# Altium PCB DP0507-0A0_20180605.PcbDoc
Units mm, origin at the board's own origin, x right, y up, seen from the top; angles counter-clockwise.
Board outline 106.5 x 35 mm, 2 copper layers (Top Layer, Bottom Layer); 39 components, 25 nets, 253 pads, 9 vias.
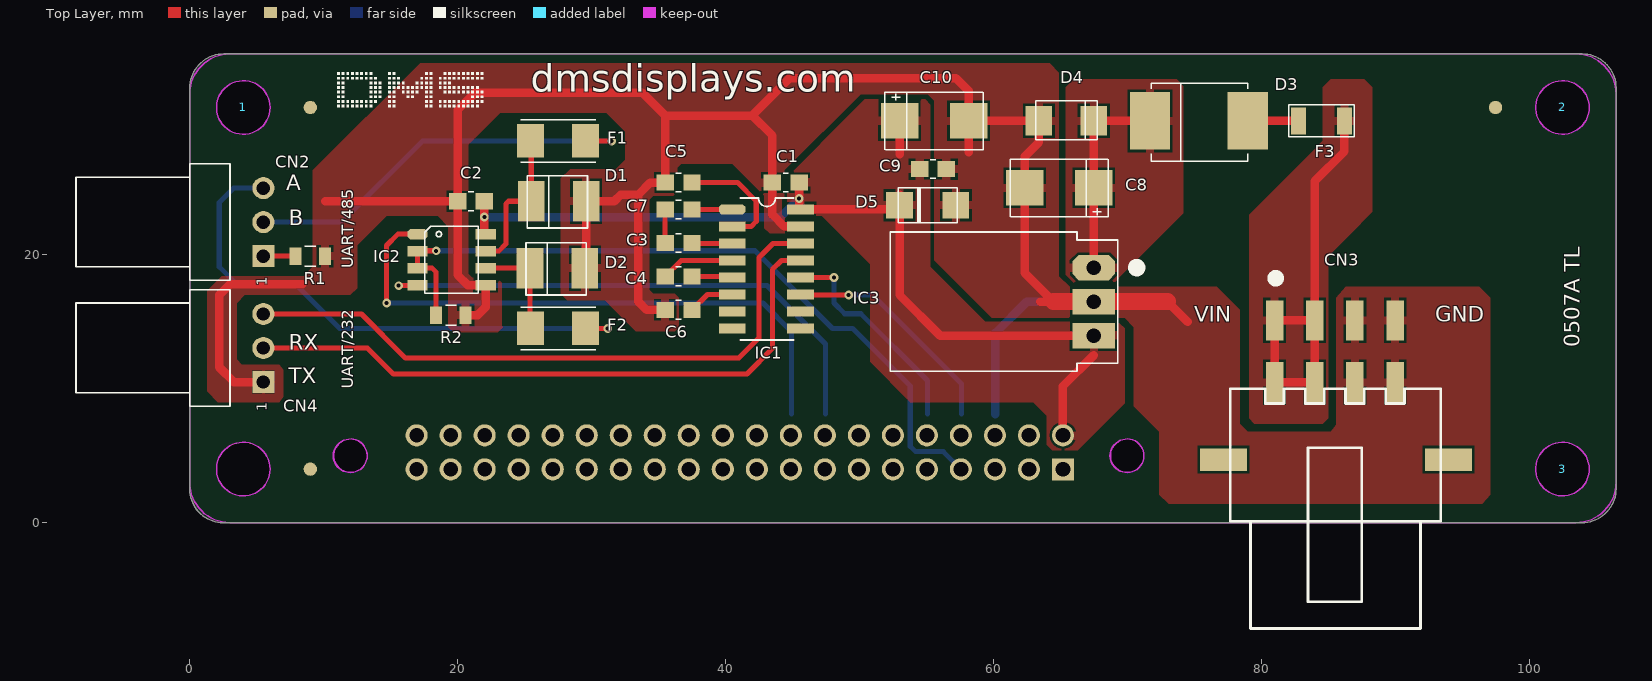
[diagram p0: Top Layer view]
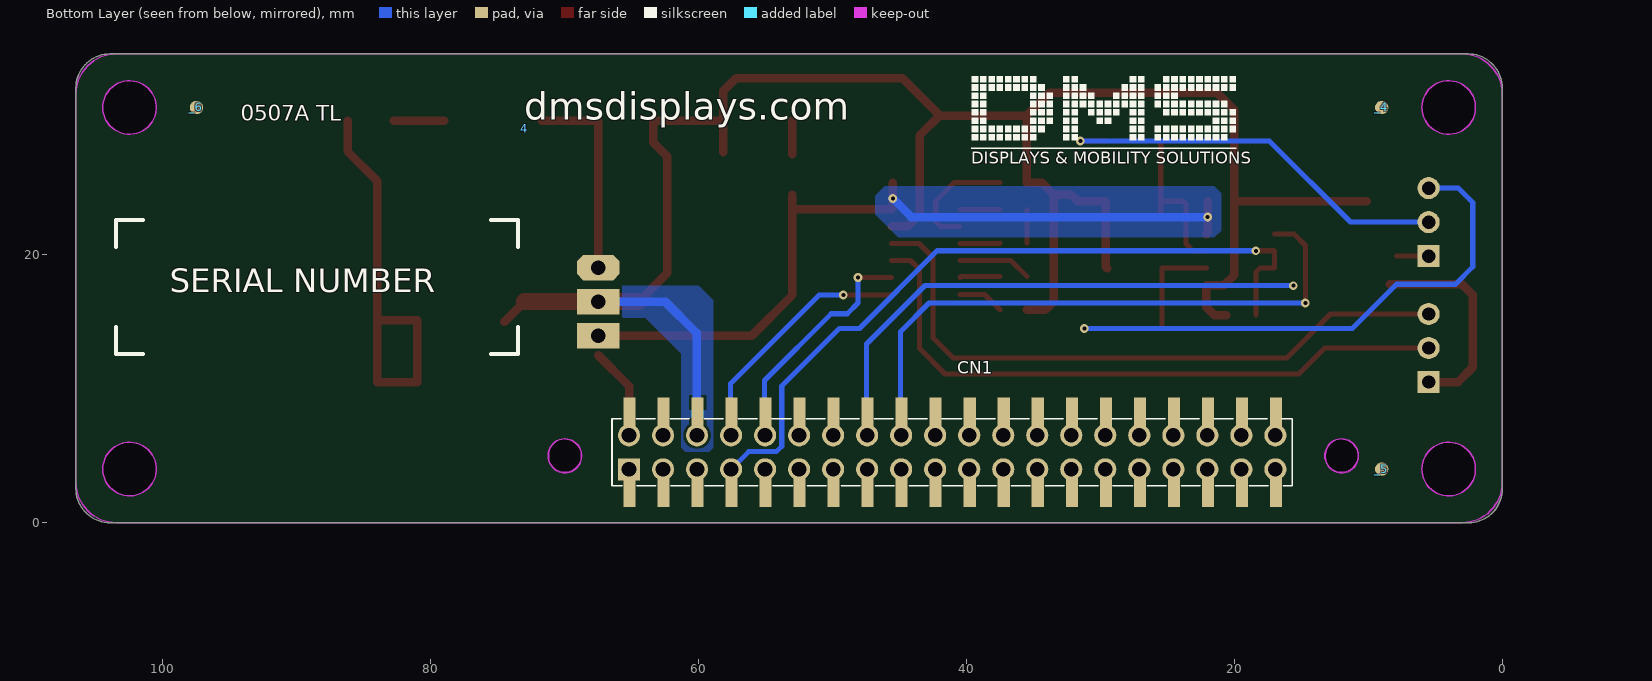
[diagram p1: Bottom Layer view, seen from below]

## Layer stack, top to bottom
Top Layer: signal copper 0.0356
Dielectric: dielectric 0.32, FR-4, Dk 4.8
Bottom Layer: signal copper 0.0356

## Board outline
0,2.5 ccw(c2.5,2.5) 2.5,0 3.5,0 103.96,0 ccw(c103.96,2.54) 106.5,2.54 106.5,4.5 106.5,32.46 ccw(c103.96,32.46) 103.96,35 103,35 2.54,35 ccw(c2.54,32.46) 0,32.46 0,32
cut-out: 10.7,5 cw(c11.95,5) 11.95,6.25 12,6.25 cw(c12,5.05) 13.2,5.05 13.2,4.9 cw(c12,4.9) 12,3.7 cw(c12,5) 10.7,5
cut-out: 68.7,5 cw(c69.95,5) 69.95,6.25 70,6.25 cw(c70,5.05) 71.2,5.05 71.2,4.9 cw(c70,4.9) 70,3.7 cw(c70,5) 68.7,5

## Design rules (kind name [scope] priority, off if disabled: settings)
AcuteAngle [InNetClass('ligacoes leds resistencias')] p1: minimum=4.50000000000000E+0001 checktracksonly=FALSE
Clearance Clearance_GND [(OnLayer('GND') AND InNet('GND')) vs OnLayer('Keep-Out Layer')] p1: gap=0.635
Clearance "Clearance_VCC_3.3V_VCC layer" [(OnLayer('VCC') AND InNet('VCC_3.3V'))] p2: gap=0.381
Clearance "Clearance_VIN_VCC layer" [(OnLayer('VCC') AND InNet('VIN'))] p3: gap=0.381
Clearance Clearance_VLEDS [InNet('VLEDS')] p4: gap=0.178
Clearance Clearance_VCC [InNet('VCC')] p5: gap=0.178
Clearance Clearance_VIN [InNet('VIN')] p6: gap=0.178
Clearance Clearance_GND_layer [(OnLayer('GND') AND InNet('GND'))] p7: gap=0.381
Clearance Clearance_Poli [(IsPad) vs (IsRegion)] p8: gap=0.178
Clearance "Clearance ALL" [All] p9: gap=0.178
ComponentClearance [All] p1 off: gap=0 collisioncheckmode=3 verticalgap=0.254 showdistances=FALSE
FabricationTestPointUsage TestPointUsage [All] p1: valid=2 allowmultiple=FALSE
FabricationTestpoint Testpoint [(IsPad And (OnTopLayer Or OnBottomLayer))] p1: side=3 testpointundercomponent=TRUE minsize=1.016 maxsize=2.54 preferedsize=1.524 minholesize=0.508 maxholesize=1.016 preferedholesize=0.813 testpointgrid=0.025 allowsidetop=TRUE allowsidebottom=TRUE usegrid=TRUE gridtolerance=0
FanoutControl Fanout_BGA [IsBGA] p1: bgadir=Out bgaviamode=Closest fanoutstyle=Staggered fanoutdirection=Alternating viagrid=0.025 // Fanout_BGA (Default Rule)
FanoutControl Fanout_LCC [IsLCC] p2: bgadir=Out bgaviamode=Centered fanoutstyle=Staggered fanoutdirection=Alternating viagrid=0.025 // Fanout_LCC (Default Rule)
FanoutControl Fanout_SOIC [IsSOIC] p3: bgadir=Out bgaviamode=Centered fanoutstyle=Staggered fanoutdirection=Alternating viagrid=0.025 // Fanout_SOIC (Default Rule)
FanoutControl Fanout_Small [(CompPinCount < 5)] p4: bgadir=Out bgaviamode=Centered fanoutstyle=Staggered fanoutdirection=OutThenIn viagrid=0.025 // Fanout_Small (Default Rule)
FanoutControl Fanout_Default [All] p5: bgadir=Out bgaviamode=Centered fanoutstyle=Staggered fanoutdirection=Alternating viagrid=0.025 // Fanout_Default (Default Rule)
HoleSize [All] p1: absolutevalues=TRUE maxlimit=12.7 minlimit=0.025 maxpercent=80.000 minpercent=20.000
HoleToHoleClearance [All] p1: gap=0.178 allowstackedmicrovias=TRUE
MinimumSolderMaskSliver [All] p1: minsoldermaskwidth=0.06
PlaneClearance [All] p1: clearance=0.254
PolygonConnect "Poligonos componentes" [All vs InComponentClass('Poligonos Componentes')] p1: connectstyle=Relief reliefconductorwidth=0.635 reliefentries=4 polygonreliefangle="90 Angle" airgapwidth=0.178
PolygonConnect PolygonConnect_VIAS [IsVia] p2: connectstyle=Direct reliefconductorwidth=0.254 reliefentries=4 polygonreliefangle="90 Angle" airgapwidth=0.254
RoutingCorners [InNetClass('ligacoes leds resistencias')] p1: cornerstyle=45-Degree minsetback=0.635 maxsetback=0.635
RoutingLayers [InNetClass('Ligação DRIVES_LEDS')] p1: top layer_v5=TRUE bottom layer_v5=FALSE
RoutingPriority RoutingPriority_1 [InNetClass('Ligação DRIVES_LEDS')] p1: routingpriority=100
RoutingTopology RoutingTopology_VERTICAL [OnLayer('MidLayer2')] p1: topology=Vertical
RoutingTopology RoutingTopology_HORIZONTAL [OnLayer('MidLayer1')] p2: topology=Horizontal
RoutingVias [All] p1: holewidth=0.3 width=0.65 viastyle="Through Hole" minholewidth=0.3 minwidth=0.65 maxholewidth=0.3 maxwidth=0.65
ShortCircuit ShortCircuit_1 [InComponent('CN1')] p1: allowed=TRUE
ShortCircuit [All] p2: allowed=FALSE
SilkToSilkClearance [All] p1: silktosilkclearance=-0.127
SilkToSolderMaskClearance SilkscreenOverComponentPads [IsPad] p1: minsilkscreentomaskgap=-0.127 clearancetoexposedcopper=TRUE
SolderMaskExpansion [(IsSMTPin)] p1: expansion=0
SolderMaskExpansion SolderMaskExpansion_1 [(IsVia)] p2: expansion=-0.508
ViasUnderSMD [All] p1: allowed=TRUE
Width Width_GND [InNet('GND')] p1: maxlimit=1.27 minlimit=0.254 preferedwidth=0.508
Width "Width_VIN and VDDAD" [(InNet('VIN') AND InNet('VDDAD'))] p2: maxlimit=12.7 minlimit=0.254 preferedwidth=0.635
Width Width_ALL [All] p3: maxlimit=12.7 minlimit=0.254 preferedwidth=0.254
9 further rules are at their usual default settings.

## Classes and differential pairs
component class DP0507-1A0: C1 C2 C3 C4 C5 C6 C7 C8 C9 C10 CN1 CN3 D1 D2 D3 D4 D5 F1 F2 F3 IC1 IC2 IC3 R1 R2
component class "Poligonos Componentes": C1 C2 C3 C4 C5 C6 C7 C8 C9 C10 CN1 CN3 D1 D2 D3 D4 D5 F1 F2 F3 IC1 IC2 IC3 R1 R2

## Components (designator, comment, footprint, x,y, rotation, side; value= is the part's Value field where it differs from the comment)
1 "" "ESPAÇADOR PCB_PRETO_BL_8MM" 4,31 r0 top
2 "" "ESPAÇADOR PCB_PRETO_BL_8MM" 102.5,31 r0 top
3 "" "ESPAÇADOR PCB_PRETO_BL_8MM" 102.5,4 r0 top
4 "" "site dmsdisplays.com_3x20mm" 73,29.4 r180 bottom
_4 "" "FIDUCTIAL MARK_1MM DIÂMETRO" 9,31 r180 bottom
_5 "" "FIDUCTIAL MARK_1MM DIÂMETRO" 9,4 r180 bottom
_6 "" "FIDUCTIAL MARK_1MM DIÂMETRO" 97.5,31 r180 bottom
C1 "B217602" C0805 44.5,25.39 r180 top
C2 "B217602" C0805 21,24 r180 top
C3 "B217613" C0805 36.5,20.89 r0 top
C4 "B217631" C0805 36.5,18.39 r0 top
C5 "B217631" C0805 36.5,25.39 r180 top
C6 "B217631" C0805 36.5,15.89 r180 top
C7 "B217613" C0805 36.5,23.39 r180 top
C8 "B217600" "COND ELECT SMD CASE C (TANTALO SMD 100UF/10V)" 67.5,25 r270 top
C9 "B217602" C0805 55.5,26.4 r0 top
C10 "B217600" "COND ELECT SMD CASE C (TANTALO SMD 100UF/10V)" 53,30 r90 top
CN1 "E215527" "SMT DUAL SOCKET HEADER BOTTOM (WR-PHD)_2X20PINS" 65.161,2.052 r270 bottom locked
CN2 "" "MOLEX-3PINOS-MACHO a 90 graus" 5.5,19.9 r90 top locked
CN3 "---TBD---" "CONECTOR SMT MACHO_WR-MPC3_WURTH_8 pinos" 81,15.1 r0 top locked
CN4 "" "MOLEX-3PINOS-MACHO a 90 graus" 5.5,10.5 r90 top locked
D1 "SMBJ7.5CA" "SMB (SMBJ7.5CA)" 25.5,24 r0 top
D2 "SMBJ7.5CA" "SMB (SMBJ7.5CA)" 25.4,19 r0 top
D3 "A120500" "DO214AB (SMC) - STPS340S" 71.7,30 r0 top
D4 "A102150" "DO214AC (SMA)" 67.5,30 r180 top
D5 "A129614" SOD-106 53,23.7 r90 top
F1 "D616404" 1812 27.5,28.5 r0 top
F2 "D616404" 1812 27.5,14.5 r0 top
F3 "D616400" R1206 84.5,30 r0 top
IC1 "MAX3232 (SOIC-16)" "SOIC-16 (MAX3232)" 40.5,23.39 r0 top
IC2 "SN65HVD3082" PSOP-8 17,21.54 r270 top
IC3 "C110035" "OKI-78SR (TO-220)_HORIZONTAL" 67.5,16.5 r90 top locked
R1 "B306009" R0805 9,19.9 r180 top
R2 "B306004" R0805 19.5,15.5 r180 top
"SERIAL NUMBER" "" "SERIGRAFIA_NUMERO SERIE_30X10MM" 103.5,12.6 r180 bottom
? "" "novo logotipo DMS sem assinatura_10x2.5mm" 11,31 r0 top
? "" "site dmsdisplays.com_3x20mm" 25.5,31.5 r0 top
? "" "ESPAÇADOR PCB_PRETO_BL_8MM" 4,4 r0 top
? "" "novo logotipo DMS com assinatura_20x7mm" 39.6,26.5 r180 bottom

## Footprints (in the part's own frame and the unit in brackets; to place one, negate y for a bottom-side part, rotate by r counter-clockwise, add the part's x,y. Pads: shape width x height; smd on the part's side, far side on the other; paste and mask are expansions set on the pad)
1812 [mm]
  rect 2x2.5 smd mask+0: 1(-2.05,0) 2(2.05,0)
  silkscreen extent -2.8,-1.6 2.8,1.6, body extent -2.85,-1.7 2.85,1.7, height 1.1
C0805 [mm]
  rect 1.3x1.2 smd mask+0: 1(-1,0) 2(1,0)
  silkscreen extent -0.2,-0.7 0.2,0.7, body extent -1.5,-0.7 1.5,0.7, height 0.93
"COND ELECT SMD CASE C (TANTALO SMD 100UF/10V)" [mm]
  rect 2.65x2.8 smd mask+0: 1(0,0) 2(0,-5.15)
  silkscreen extent -2.15,-6.25 2.15,1.1, body extent -1.75,-6.35 1.76,1.25, height 2.79
"CONECTOR SMT MACHO_WR-MPC3_WURTH_8 pinos" [mm]
  rect 1.3x3 smd mask+0: 1(0,0) 2(3,0) 3(6,0) 4(9,0) 5(0,-4.62) 6(3,-4.62) 7(6,-4.62) 8(9,-4.62)
  rect 3.5x1.7 smd mask+0: A(-3.8,-10.4) A(13,-10.4)
  silkscreen extent -3.3,-23 12.4,3.47, body extent -5.05,-23 14.05,1.25, height 10.3
"DO214AB (SMC) - STPS340S" [mm]
  rect 3x4.3 smd: 1(0,0) 2(7.3,0)
  silkscreen extent 0.1,-3 7.3,2.8, body extent -0.2,-3.05 7.6,2.85, height 2.4
"DO214AC (SMA)" [mm]
  rect 2x2.2 smd: 1(0,0) 2(4.1,0)
  silkscreen extent -0.25,-1.5 4.35,1.4, body extent -0.55,-1.35 4.65,1.25, height 2.4
"ESPAÇADOR PCB_PRETO_BL_8MM" [mm]
  round 4 hole 4 unplated paste-15 mask-15: 1(0,0)
  Keep-Out Layer circle w0.1: c0,0 r2
  Multi-Layer pour cut-out: -0.05,2 0.5,1.95 1.05,1.7 1.5,1.3 1.8,0.9 1.95,0.35 2,0 1.95,-0.5 1.75,-0.95 1.45,-1.4 0.95,-1.75 0.45,-1.95 0,-2 -0.65,-1.9 -1.2,-1.6 -1.7,-1.1 -1.95,-0.45 -2,0.15 -1.85,0.75 -1.6,1.2 -1.3,1.55 -0.9,1.8 -0.5,1.95
  body extent -2.3,-2.3 2.3,2.3, height 3.69
"FIDUCTIAL MARK_1MM DIÂMETRO" [mm]
  round 1 smd far side: 0(0,0)
  round 1 smd: 0(0,0)
"MOLEX-3PINOS-MACHO a 90 graus" [mil]
  rect 65x65 hole 39.37: 1(0,0)
  round 65 hole 39.37: 2(100,0) 3(200,0)
  silkscreen extent -71,98 272,551, body extent -71,-16 272,551, height 236
"novo logotipo DMS com assinatura_20x7mm" [mm]
  silkscreen extent -0.04,1.4 19.72,6.87
"novo logotipo DMS sem assinatura_10x2.5mm" [mm]
  silkscreen extent 0,0 10.92,2.63
"OKI-78SR (TO-220)_HORIZONTAL" [mm]
  oct 1.9x3.2 hole 1.1: 1(2.54,0)
  rect 1.9x3.2 hole 1.1: 2(0,0) 3(-2.54,0)
  silkscreen extent -5.2,-3.5 5.2,15.2, body extent -5.2,-1.3 5.2,15.2, height 7.98
PSOP-8 [mm]
  oct 0.8x1.5 smd mask+0: 1(0,0)
  rect 0.8x1.5 smd mask+0: 2(1.27,0) 3(2.54,0) 4(3.81,0) 5(3.81,5.1) 6(2.54,5.1) 7(1.27,5.1) 8(0,5.1)
  silkscreen extent -0.6,0.55 4.4,4.55, body extent -0.6,-0.5 4.4,5.6, height 1.6
R0805 [mm]
  rect 0.9x1.3 smd mask+0: 1(-1.1,0) 2(1.1,0)
  silkscreen extent -0.4,-0.75 0.4,0.75, body extent -1.2,-0.62 1.2,0.63, height 0.55
R1206 [mm]
  rect 1.1x2 smd mask+0: 1(-1.714,0) 2(1.714,0)
  silkscreen extent -2.45,-1.2 2.45,1.2, body extent -1.8,-0.8 1.8,0.8, height 0.55
"SERIGRAFIA_NUMERO SERIE_30X10MM" [mm]
  silkscreen extent 0,0 30,10
"site dmsdisplays.com_3x20mm" [mm]
"SMB (SMBJ7.5CA)" [mm]
  rect 2x3 smd mask+0: 1(0,0) 2(4.1,0)
  silkscreen extent -0.3,-2 4.2,1.9, body extent -0.75,-2 4.75,1.9, height 2.45
"SMT DUAL SOCKET HEADER BOTTOM (WR-PHD)_2X20PINS" [mm] "SMT DUAL SOCKET HEADER BOTTOM ENTRY"
  rect 1.651x1.651 hole 1.1 mask+0: 1(-1.93,-0.04)
  rect 2.5x0.9 smd mask-15: 1(-0.35,0) 2(-6.05,0) 3(-0.35,2.54) 4(-6.05,2.54) 5(-0.35,5.08) 6(-6.05,5.08) 7(-0.35,7.62) 8(-6.05,7.62) 9(-0.35,10.16) 10(-6.05,10.16) 11(-0.35,12.7) 12(-6.05,12.7) 13(-0.35,15.24) 14(-6.05,15.24) 15(-0.35,17.78) 16(-6.05,17.78) 17(-0.35,20.32) 18(-6.05,20.32) 19(-0.35,22.86) 20(-6.05,22.86) 21(-0.35,25.4) 22(-6.05,25.4) 23(-0.35,27.94) 24(-6.05,27.94) 25(-0.35,30.48) 26(-6.05,30.48) 27(-0.35,33.02) 28(-6.05,33.02) 29(-0.35,35.56) 30(-6.05,35.56) 31(-0.35,38.1) 32(-6.05,38.1) 33(-0.35,40.64) 34(-6.05,40.64) 35(-0.35,43.18) 36(-6.05,43.18) 37(-0.35,45.72) 38(-6.05,45.72) 39(-0.35,48.26) 40(-6.05,48.26)
  rect 1.8x0.9 on Bottom Solder mask+0: 1(0,0) 2(-6.4,0) 3(0,2.54) 4(-6.4,2.54) 5(0,5.08) 6(-6.4,5.08) 7(0,7.62) 8(-6.4,7.62) 9(0,10.16) 9(0,12.7) 9(0,15.24) 9(0,17.78) 9(0,20.32) 9(0,22.86) 9(0,25.4) 9(0,27.94) 9(0,30.48) 9(0,33.02) 9(0,35.56) 9(0,38.1) 9(0,40.64) 9(0,43.18) 9(0,45.72) 9(0,48.26) 10(-6.4,10.16) 10(-6.4,12.7) 10(-6.4,15.24) 10(-6.4,17.78) 10(-6.4,20.32) 10(-6.4,22.86) 10(-6.4,25.4) 10(-6.4,27.94) 10(-6.4,30.48) 10(-6.4,33.02) 10(-6.4,35.56) 10(-6.4,38.1) 10(-6.4,40.64) 10(-6.4,43.18) 10(-6.4,45.72) 10(-6.4,48.26)
  rect 1.8x0.9 on Bottom Paste mask+0: 1(0,0) 1(0,15.24) 1(0,17.78) 1(0,20.32) 1(0,22.86) 1(0,25.4) 1(0,27.94) 1(0,30.48) 1(0,33.02) 1(0,35.56) 1(0,38.1) 1(0,40.64) 1(0,43.18) 1(0,45.72) 1(0,48.26) 2(-6.4,0) 2(-6.4,15.24) 2(-6.4,17.78) 2(-6.4,20.32) 2(-6.4,22.86) 2(-6.4,25.4) 2(-6.4,27.94) 2(-6.4,30.48) 2(-6.4,33.02) 2(-6.4,35.56) 2(-6.4,38.1) 2(-6.4,40.64) 2(-6.4,43.18) 2(-6.4,45.72) 2(-6.4,48.26) 3(0,2.54) 4(-6.4,2.54) 5(0,5.08) 6(-6.4,5.08) 7(0,7.62) 8(-6.4,7.62) 9(0,10.16) 10(-6.4,10.16)
  round 1.651 hole 1.1 mask+0: 2(-4.47,-0.04) 3(-1.93,2.5) 4(-4.47,2.5) 5(-1.93,5.04) 6(-4.47,5.04) 7(-1.93,7.58) 8(-4.47,7.58) 9(-1.93,10.12) 10(-4.47,10.12) 11(-1.93,12.66) 12(-4.47,12.66) 13(-1.93,15.2) 14(-4.47,15.2) 15(-1.93,17.74) 16(-4.47,17.74) 17(-1.93,20.28) 18(-4.47,20.28) 19(-1.93,22.82) 20(-4.47,22.82) 21(-1.93,25.36) 22(-4.47,25.36) 23(-1.93,27.9) 24(-4.47,27.9) 25(-1.93,30.44) 26(-4.47,30.44) 27(-1.93,32.98) 28(-4.47,32.98) 29(-1.93,35.52) 30(-4.47,35.52) 31(-1.93,38.06) 32(-4.47,38.06) 33(-1.93,40.6) 34(-4.47,40.6) 35(-1.93,43.14) 36(-4.47,43.14) 37(-1.93,45.68) 38(-4.47,45.68) 39(-1.93,48.22) 40(-4.47,48.22)
  silkscreen extent -5.7,-1.31 -0.7,49.49, body extent -6.8,-1.3 0.4,49.5, height 3.8
SOD-106 [mm]
  rect 2x2 smd mask+0: 1(0,0) 2(0,-4.2)
  silkscreen extent -1.3,-4.3 1.3,0.1, body extent -1.31,-4.6 1.29,0.4, height 2
"SOIC-16 (MAX3232)" [mm]
  oct 2x0.762 smd mask+0: 1(0,0)
  rect 2x0.762 smd mask+0: 2(0,-1.27) 3(0,-2.54) 4(0,-3.81) 5(0,-5.08) 6(0,-6.35) 7(0,-7.62) 8(0,-8.89) 9(5.1,-8.89) 10(5.1,-7.62) 11(5.1,-6.35) 12(5.1,-5.08) 13(5.1,-3.81) 14(5.1,-2.54) 15(5.1,-1.27) 16(5.1,0)
  silkscreen extent 0.6,-9.74 4.6,0.85, body extent -0.3,-9.35 5.5,0.45, height 1.75

## Part data
C1 C2: library part CAP, "COND. CERAMICO SMD 10% 100NF (0805) 50V"
C3 C7: library part CAP, "COND. CERAMICO SMD 10% 100NF (0805) 100V"
C4 C5 C6: library part CAP, "COND. CERAMICO SMD 330NF (0805) 50V"
C8 C10: library part "COND. ELECTR. VERT. 220UF/63V", "COND. TANTALO SMD 100UF/10V, LOW ESR 10% (2312)"
C9: library part "COND. CERAMICO SMD 10% 100NF (0805) 50V", "COND. CERAMICO SMD 10% 100NF (0805) 50V"
CN1: library part RASPBERRY_PI_CONNECTOR, "CONECTOR 2X20 PINOS SMD DP2,54MM"
CN3: library part CON8, "CONECTOR SMT MACHO_WR-MPC3_WURTH_8 pinos"
D1 D2: library part "DIODO SMD SMBJ7.5CA", "DIODO SMD SMBJ7.5CA"
D3: library part "DIODE SCHOTTKY", "DIODO SCHOTTKY SMD STPS340S"
D4: library part "DIODE ZENER", "DIODO TRANS-ZORB SMAJ30A"
D5: library part "DIODO ZENER 5V6/1W", "DIODO ZENER SMD 5V6/1W (SOD-106)"
F1 F2: library part "Fuse Thermal", "FUSIVEL FUS.LENTA SMD REARMÁVEL PTC 0.14A (1812)"
F3: library part "FUSIVEL FUS.LENTA SMD 2A", "FUSIVEL FUS.LENTA SMD 2A"
IC1: "C.I. SMD MAX3232"
IC2: "INTEGRADO 8 PINOS SMD - SN65HVD3082ED"
IC3: library part "OKI-78SR (TO-220)", "CONVERSOR DC/DC OKI-78SR"
R1: library part "RESISTENCIA SMD", "RESISTÊNCIA SMD"
R2: library part "RESISTENCIA SMD 5% 1K8 (0805)", "RESISTENCIA SMD 5% 1K8 (0805)"

## Free pads (board coordinates)
  round 2.5 hole 2.5 unplated mask-15: 0(12,5) 0(70,5)

## Via types
v1: diameter 0.65, hole 0.3, Top Layer to Bottom Layer, 9 vias

## Nets (pads, with @x,y where several pads share a name; then routed paths per layer and width w, separated by ;. In a path a pad name is that pad's centre, name@x,y a point inside that pad or via, vN(x,y) a via of type N, cw(c..) or ccw(c..) an arc to the next point about the centre after c; other vN are vias at no path point)
A: CN2.3 F2.2 | length 41.1
  Top Layer w0.381: F2.2 v1(31.2,14.5)
  Bottom Layer w0.381: CN2.3 3.28,24.98 2.2,23.9 2.2,19.1 3.5,17.8 7.9,17.8 11.2,14.5 15,14.5 v1(31.2,14.5)
B: CN2.2 F1.2 | length 32
  Top Layer w0.381: F1.2 v1(31.5,28.5)
  Bottom Layer w0.381: CN2.2 11.34,22.44 ; 12.4,23.5 11.34,22.44 ; v1(31.5,28.5) 17.4,28.5 11.34,22.44
DIR-TTL485: CN1.7@57.541,2.402 CN1.7@57.581,3.982 IC2.2 IC2.3 R2.2 | length 56
  Top Layer w0.381: R2.2 18.4,18.7 18.1,19 IC2.3 IC2.2 17.03,20.3 v1(18.4,20.3)
  Bottom Layer w0.381: v1(18.4,20.3) 42.2,20.3 48,14.5 49.5,14.5 53.8,10.2 53.8,5.7 54.2,5.3 56.263,5.3 CN1.7@57.581,3.982
EARTH: 
GND: C1.2 C2.2 C5.2 C6.2 C8.2 C9.2 C10.2 CN1.6@60.081,8.102 CN1.6@60.121,6.522 CN3.3 CN3.4 CN3.7 CN3.8 CN4.1 D1.2 D2.2 D4.2 D5.2 IC1.15 IC2.5 IC3.2 R1.1 R2.1 | length 172.6
  Top Layer w0.635: CN4.1 3.3,10.5 2.2,11.6 2.2,17 3,17.8 8.4,17.8 ; 10.1,24 C2.2 ; R2.1 21.5,15.5 22.1,16.1 IC2.5 20.77,17.73 20,18.5 C2.2 ; D2.2 29.6,19.1 D1.2 31.7,24 32.2,24.5 33.5,24.5 ; C6.2 34.11,15.89 33.5,16.5 33.5,24.5 ; IC1.15 44.38,22.12 43.5,23 C1.2 43.5,28.9 42,30.4 ; 58.15,27.65 C10.2 ; 63.5,16.5 64.5,16.5 62.35,18.65 C8.2 62.35,27.35 63.4,28.4 D4.2 C10.2 ; 73,16.5 74.5,15 ; C2.2 20,30.8 21.3,32.1 33.8,32.1 35.5,30.4 ; 33.5,24.5 34.39,25.39 C5.2 35.5,27 35.5,30.4 ; 35.5,30.4 42,30.4 ; 42,30.4 44.8,33.2 57.2,33.2 58.15,32.25 C10.2
  Top Layer w1.27: 64.5,16.5 IC3.2 73,16.5
  Bottom Layer w0.635: CN1.6@60.161,8.102 60.161,14.161 62.5,16.5 IC3.2
NetC3_1: C3.1 C7.2 | length 2.5
  Top Layer w0.381: C3.1 C7.2
NetC3_2: C3.2 IC1.3 | length 3
  Top Layer w0.381: C3.2 37.54,20.85 IC1.3
NetC4_1: C4.1 IC1.4 | length 5.5
  Top Layer w0.381: C4.1 36.69,19.58 IC1.4
NetC4_2: C4.2 IC1.5 | length 3
  Top Layer w0.381: C4.2 40.42,18.39 IC1.5
NetC5_1: C5.1 IC1.2 | length 8.8
  Top Layer w0.381: C5.1 40.91,25.39 42.3,24 42.3,22.5 41.92,22.12 IC1.2
NetC6_1: C6.1 IC1.6 | length 3.5
  Top Layer w0.381: C6.1 38.65,17.04 IC1.6
NetC7_1: C7.1 IC1.1 | length 3
  Top Layer w0.381: C7.1 IC1.1
NetC8_1: C8.1 D3.1 D4.1 IC3.1 | length 15.2
  Top Layer w0.635: IC3.1 C8.1 D4.1 D3.1
NetCN2_1: CN2.1 R1.2 | length 2.4
  Top Layer w0.381: CN2.1 R1.2
NetD1_1: D1.1 F1.1 IC2.7 | length 12.5
  Top Layer w0.381: IC2.7 23.07,20.27 23.6,20.8 23.6,23.8 23.8,24 D1.1 ; F1.1 25.5,28.45 D1.1 ; D1.1@25.5,22.7 D1.1
NetD2_1: D2.1 F2.1 IC2.6 | length 7.8
  Top Layer w0.381: IC2.6 D2.1 25.4,14.55 F2.1
NetD3_2: D3.2 F3.1 | length 3.8
  Top Layer w0.635: D3.2 F3.1
RX-RS232: CN4.2 IC1.13 | length 47.9
  Top Layer w0.381: CN4.2 13.26,13.04 15.2,11.1 41.6,11.1 43.5,13 43.5,18.9 44.18,19.58 IC1.13
RX-TTL: CN1.10@55.001,8.102 CN1.10@55.041,6.522 IC1.12 | length 16.3
  Top Layer w0.381: IC1.12 45.61,18.3 v1(48.1,18.3)
  Bottom Layer w0.381: v1(48.1,18.3) 48.1,16.4 48.9,15.6 50.1,15.6 55.081,10.619 CN1.10@55.081,8.102
RX-TTL485: CN1.18 IC2.1 | length 44.2
  Top Layer w0.381: v1(14.7,16.4) 14.7,20.7 15.54,21.54 IC2.1
  Bottom Layer w0.381: v1(14.7,16.4) 42.8,16.4 44.921,14.279 CN1.18@44.921,8.102
TX-RS232: CN4.3 IC1.14 | length 48.5
  Top Layer w0.381: CN4.3 12.82,15.58 16.1,12.3 41,12.3 42.5,13.8 42.5,19.8 43.55,20.85 IC1.14
TX-TTL: CN1.8@57.541,8.102 CN1.8@57.581,6.522 IC1.11 | length 17.1
  Top Layer w0.381: IC1.11 45.64,17 v1(49.2,17)
  Bottom Layer w0.381: v1(49.2,17) 51,17 57.621,10.379 CN1.8@57.621,8.102
TX-TTL485: CN1.16 IC2.4 | length 40.3
  Top Layer w0.381: v1(15.6,17.7) 16.97,17.7 IC2.4
  Bottom Layer w0.381: v1(15.6,17.7) 43.1,17.7 47.461,13.339 CN1.16@47.461,8.102
VCC_5V: C1.1 C2.1 C9.1 C10.1 CN1.2@65.161,8.102 CN1.2@65.201,6.522 D5.1 IC1.16 IC2.8 IC3.3 | length 68.7
  Top Layer w0.635: C2.1 v1(22,22.82) 22,21.64 IC2.8 ; C1.1 45.5,23.49 IC1.16 52.89,23.39 D5.1@53,23.5 ; D5.1@53,24.5 D5.1@53,23.5 ; 53,27.5 C10.1 ; CN1.2@65.201,6.522 65.201,10.201 67.5,12.5 ; IC3.3 56.04,13.96 53,17 D5.1@53,23.5
  Bottom Layer w0.635: v1(22,22.82) 44.12,22.82 v1(45.5,24.2)
VIN: CN3.1 CN3.2 CN3.5 CN3.6 F3.2 | length 31.1
  Top Layer w0.635: F3.2 86.215,27.715 84,25.5 CN3.2 ; CN3.2 CN3.6 CN3.5 CN3.1 CN3.2
pads on no net: 1.1 2.1 3.1 ?.1 _4.0 _5.0 _6.0 CN1.1 CN1.2@16.901,8.452 CN1.2@19.441,8.452 CN1.2@21.981,8.452 CN1.2@24.521,8.452 CN1.2@27.061,8.452 CN1.2@29.601,8.452 CN1.2@32.141,8.452 CN1.2@34.681,8.452 CN1.2@37.221,8.452 CN1.2@39.761,8.452 CN1.2@42.301,8.452 CN1.2@44.841,8.452 CN1.2@47.381,8.452 CN1.2@49.921,8.452 CN1.2@65.161,8.452 CN1.3 CN1.4 CN1.5 CN1.6@60.081,8.452 CN1.7@57.541,2.052 CN1.8@57.541,8.452 CN1.9 CN1.10@16.901,8.452 CN1.10@19.441,8.452 CN1.10@21.981,8.452 CN1.10@24.521,8.452 CN1.10@27.061,8.452 CN1.10@29.601,8.452 CN1.10@32.141,8.452 CN1.10@34.681,8.452 CN1.10@37.221,8.452 CN1.10@39.761,8.452 CN1.10@42.301,8.452 CN1.10@44.841,8.452 CN1.10@47.381,8.452 CN1.10@49.921,8.452 CN1.10@52.461,8.452 CN1.10@55.001,8.452 CN1.11 CN1.12 CN1.13 CN1.14 CN1.15 CN1.17 CN1.19 CN1.20 CN1.21 CN1.22 CN1.23 CN1.24 CN1.25 CN1.26 CN1.27 CN1.28 CN1.29 CN1.30 CN1.31 CN1.32 CN1.33 CN1.34 CN1.35 CN1.36 CN1.37 CN1.38 CN1.39 CN1.40 CN3.A IC1.7 IC1.8 IC1.9 IC1.10

## Polygon pours and split planes (outlines as drawn)
GND on Top Layer "Top Layer-No Net" (solid, remove dead copper, pour order 2): 86.3,17.6 85.6,16.8 85.6,7.3 85.2,6.8 79,6.8 78.4,7.4 78.4,15.9 76.7,17.6 65.7,17.6 64.9,18.4 64.9,33.6 64.2,34.3 17.2,34.3 9.2,26.3 9.2,19.1 8.5,18.4 2.4,18.4 1.3,17.3 1.3,9.8 2.1,9 6.7,9 7,9.4 7,11.4 6.7,11.8 3.9,11.8 3.5,12.2 3.5,16.4 4.1,17 12,17 12.5,17.5 12.5,20.7 14.7,22.9 18.5,22.9 19.3,22.1 19.3,14.6 19.7,14.2 23,14.2 23.4,14.6 23.3,14.7 23.3,17.9 22.9,18.3 21.1,18.3 20.8,18.6 20.8,28.2 23.2,30.6 31.1,30.6 32.5,29.2 32.5,27.1 31.8,26.4 28.4,26.4 27.7,25.7 27.7,17.1 28.2,16.6 31,16.6 33.3,14.3 36.2,14.3 36.5,14.6 36.5,16.8 36.2,17.1 34.6,17.1 34.3,17.4 34.3,24.1 34.6,24.4 36.1,24.4 36.4,24.7 36.4,26.5 36.7,26.8 40.5,26.8 42.9,24.4 42.9,22 43.3,21.6 46.9,21.6 46.9,22.6 44.6,22.6 44.2,23 44.2,24.1 44.4,24.3 44.4,26.3 50.1,32 55.1,32 55.6,31.5 55.6,19.6 59.9,15.3 69.8,15.3 70.5,14.6 70.5,8.7 72.4,6.8 72.4,2.1 73.1,1.4 96.5,1.4 97.1,2.1 97.1,16.8 96.3,17.6
VIN on Top Layer "Top Layer-No Net 2" (solid, remove dead copper, pour order 8): 86.7,33.1 85.2,33.1 84.6,32.5 84.6,32.3 84.6,28.5 83.7,27.6 79.1,23 79.1,8.7 79.1,7.8 79.5,7.4 84.6,7.4 85,7.8 85,8.7 85,19.9 86.6,21.5 88.3,23.2 88.3,32.5 87.7,33.1 87.3,33.1
VCC_5V on Top Layer "Top Layer-No Net 1" (solid, remove dead copper, pour order 4): 53.3,31.6 50.4,31.6 49.1,30.3 44.6,25.8 44.6,24.8 44.6,23 44.7,22.9 44.8,22.9 47.2,22.9 47.9,22.2 50.8,19.3 50.8,17.1 50.8,12 53.8,9 63,9 64,8 64,5.8 64.4,5.4 64.5,5.4 66.7,5.4 67.5,6.2 66.7,5.4 66.3,5.4 66.3,5.5 66.3,5.4 69.8,8.9 69.8,14.1 69.8,14.5 69.3,15 69.2,15 59.4,15 58.4,16 55.3,19.1 55.3,27.1 55.3,31.2 54.9,31.6
NetC8_1 on Top Layer "Top Layer-No Net 1" (solid, remove dead copper, pour order 8): 71.8,33.1 66.2,33.1 65.7,32.6 65.7,32.2 65.7,32.6 66.2,33.1 66.3,33.1 66,33.1 65.4,32.5 65.4,32.4 65.4,18.5 66,17.9 66.1,18 66.3,18 69.1,18 69.6,18.5 74.2,23.1 74.2,32.5 74.2,32.6 73.7,33.1 72.7,33.1
VCC_5V on Bottom Layer "Top Layer-No Net 1" (solid, remove dead copper, pour order 10): 45.2,25.1 21.5,25.1 21,24.6 21,24.4 21,21.8 21.5,21.3 21.6,21.3 45.1,21.3 46.7,22.9 46.8,23 46.8,24.4 46.1,25.1
GND on Bottom Layer "Top Layer-No Net 1" (solid, remove dead copper, pour order 12): 68.6,17.7 60,17.7 58.9,16.6 58.9,16.5 58.9,5.6 59.2,5.3 59.3,5.3 61,5.3 61.3,5.6 61.3,5.7 61.3,12.6 64,15.3 69.6,15.3 69.8,15.5 69.9,15.6 69.9,17.4 69.6,17.7

## Keep-outs
Keep-Out Layer:
  circle w0.1: c12,5 r1.25
  circle w0.1: c70,5 r1.25
  lines w0.1: 103.5,0 3,0 cw(c3,3) 0,3 -0.001,32 cw(c2.999,32) 2.999,35 103.5,35 cw(c103.5,32) 106.5,32 106.501,3 cw(c103.501,3) 103.501,0

## Silkscreen, mask and mechanical layers (free items; w line width, h text height)
Top Overlay:
  text "A" at 7.2,24.4 h2
  text "B" at 7.4,21.8 h2
  text "UART/485" at 12.5,19 h1.5 r90
  text "VIN" at 75,14.6 h2
  text "GND" at 93,14.6 h2
  text "0507A TL" at 104.2,13.1 h2 r90
  text "RX" at 7.4,12.5 h2
  text "TX" at 7.4,10 h2
  text "UART/232" at 12.5,10 h1.5 r90
Bottom Overlay:
  text "0507A TL" at 94.2,29.6 h2

## Text inside footprints (layer, text, board x,y; h text height)
4: Bottom Overlay "dmsdisplays.com" at 73.025,29.4 h3.5
CN2: Top Overlay "1" at 5.75,17.7 h0.76 r90
CN4: Top Overlay "1" at 5.75,8.3 h0.76 r90
?: Top Overlay "dmsdisplays.com" at 25.475,31.5 h3.5
?: Bottom Overlay "DISPLAYS & MOBILITY SOLUTIONS" at 39.64,26.49 h1.55